# Altium PCB madiz_plate_v3_02.pcbdoc (part 1 of 2)
Units mil, origin at the board's own origin, x right, y up, seen from the top; angles counter-clockwise.
Board outline 3839.67 x 4045.62 mil, 2 copper layers (Top Layer, Bottom Layer); 68 components, 228 nets, 314 pads, 311 vias.
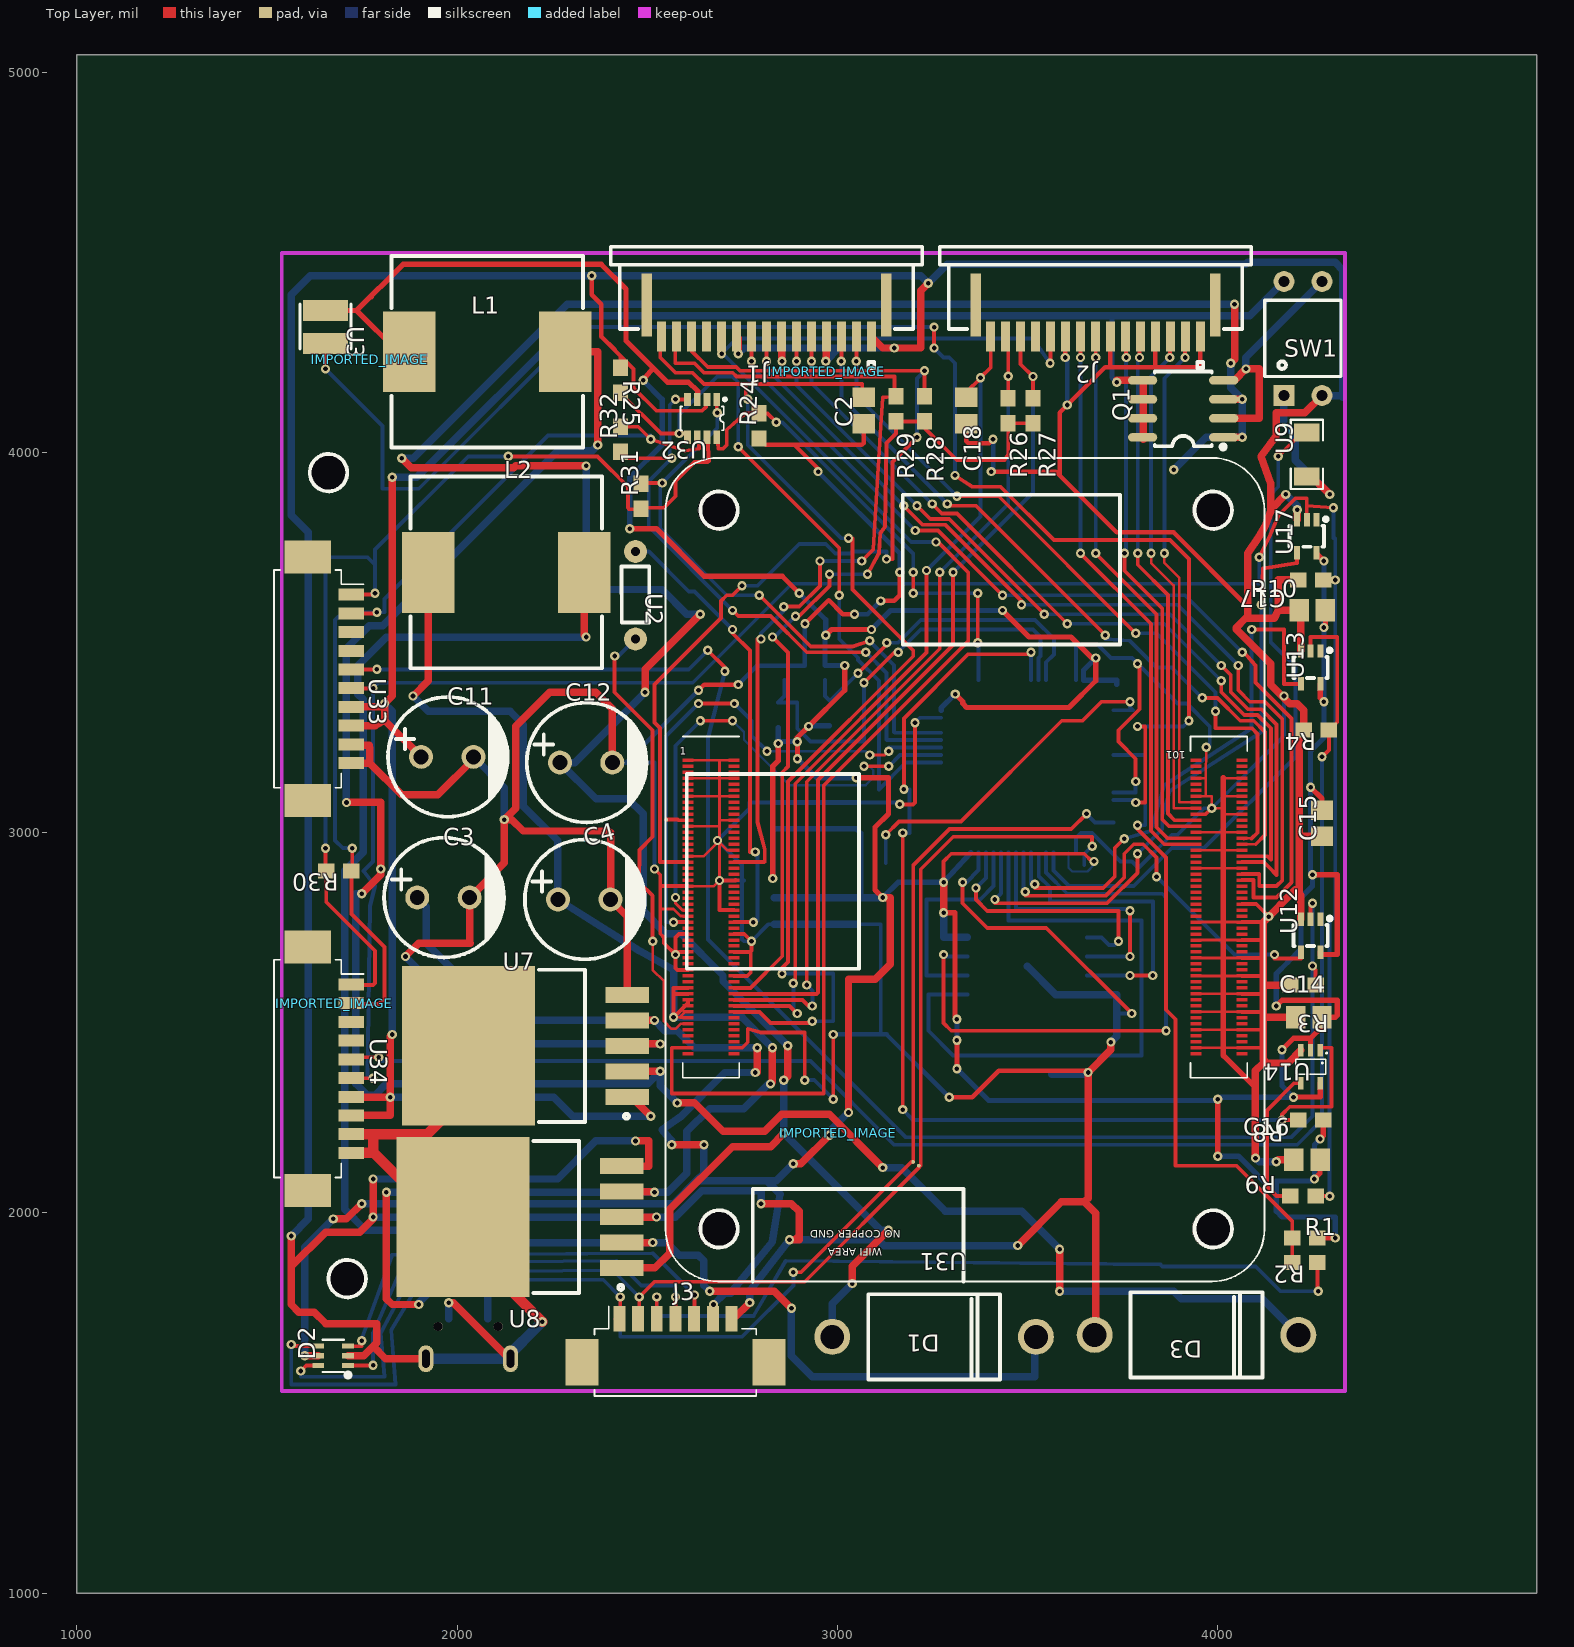
[diagram p0: Top Layer view]
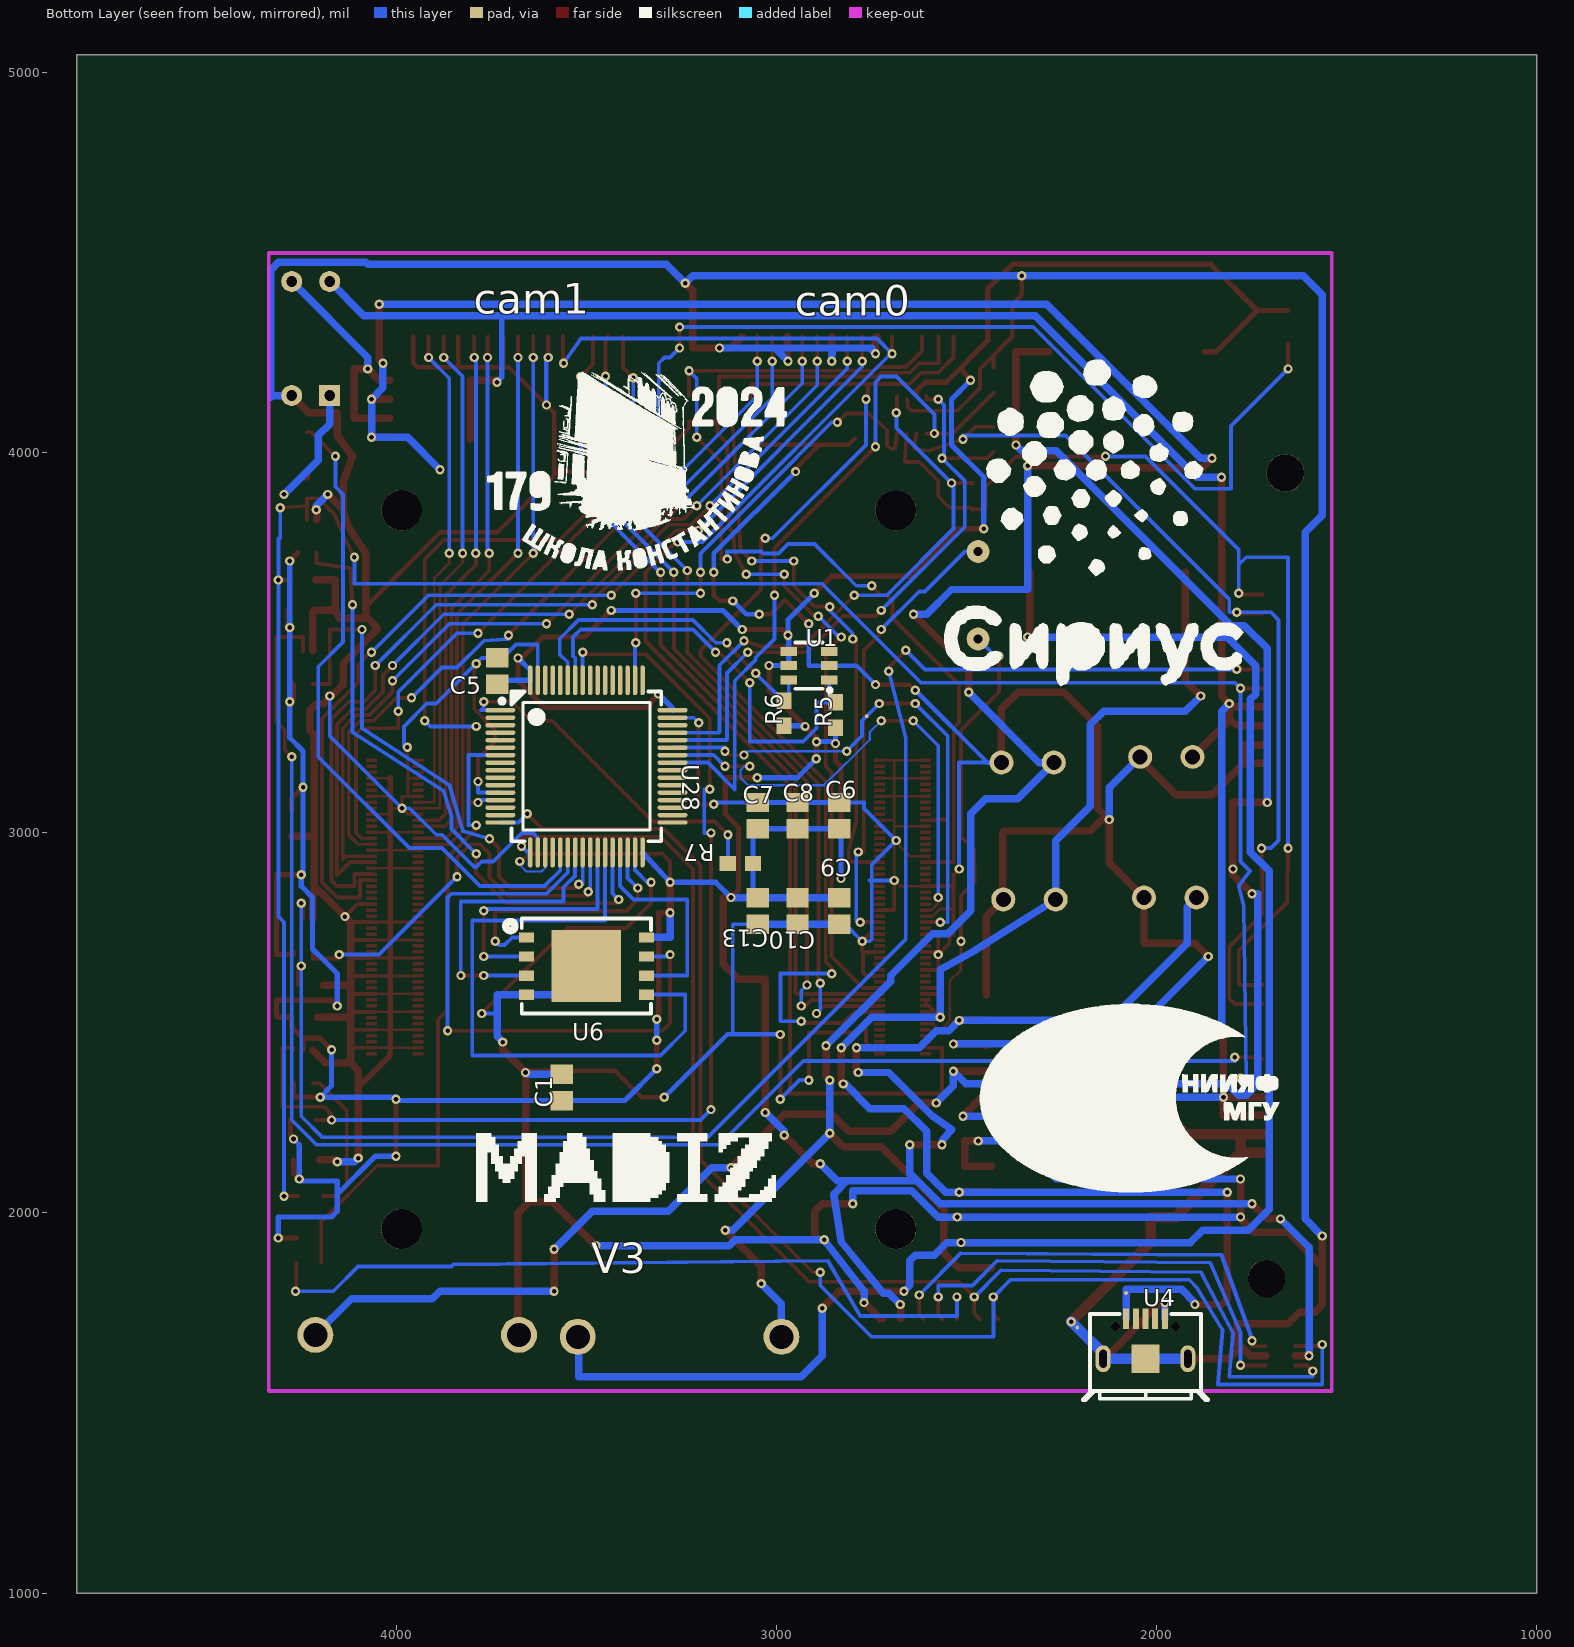
[diagram p1: Bottom Layer view, seen from below]

## Layer stack, top to bottom
Top Layer: signal copper (thickness not stored)
Dielectric: dielectric 12.6, FR-4, Dk 4.8
Bottom Layer: signal copper (thickness not stored)

## Board outline
4839.67,1000 1000,1000 1000,5045.62 4839.67,5045.62

## Components (designator, comment, footprint, x,y, rotation, side; value= is the part's Value field where it differs from the comment)
C1 "Capacitor 22pf" CAPACIOTR0805#1 3564.4,2329.4 r225 bottom
C2 "Capacitor 22pf" CAPACIOTR0805#2 3069.4,4109.4 r135 top
C3 "220uF" CAP-TH_BD8.0-P3.50-D0.6-FD 1964.4,2829.4 r0 top
C4 "220uF" CAP-TH_BD8.0-P3.50-D0.6-FD 2334.4,2824.4 r0 top
C5 "Capacitor 22pf" CAPACIOTR0805#1 3734.4,3424.4 r225 bottom
C6 "Capacitor 22pf" CAPACIOTR0805#1 2834.4,3044.4 r225 bottom
C7 "Capacitor 22pf" CAPACIOTR0805#1 3049.4,3044.4 r225 bottom
C8 "Capacitor 22pf" CAPACIOTR0805#1 2944.4,3044.4 r225 bottom
C9 "Capacitor 22pf" CAPACIOTR0805#1 2834.4,2794.4 r45 bottom
C10 "Capacitor 22pf" CAPACIOTR0805#1 2944.4,2794.4 r45 bottom
C11 "680uF" CAP-TH_BD8.0-P3.50-D0.6-FD 1974.4,3199.4 r0 top
C12 "680uF" CAP-TH_BD8.0-P3.50-D0.6-FD 2339.4,3184.4 r0 top
C13 "Capacitor 22pf" CAPACIOTR0805#1 3049.4,2794.4 r45 bottom
C14 "Capacitor 22pf" CAPACIOTR0805#2 4239.4,2514.4 r45 top
C15 "Capacitor 22pf" CAPACIOTR0805#2 4274.4,3024.4 r135 top
C16 "Capacitor 22pf" CAPACIOTR0805#2 4234.4,2139.4 r45 top
C17 "Capacitor 22pf" CAPACIOTR0805#2 4249.4,3584.4 r225 top
C18 "Capacitor 22pf" CAPACIOTR0805#2 3339.4,4109.4 r135 top
D1 "1N5822_C82806" DO-201AD_BD5.3-L8.4-P12.50-D1.4-RD 3254.4,1674.4 r180 top
D2 "PJSRV05W-4GDW" SOT-363_L2.0-W1.3-P0.65-LS2.1-BL 1674.4,1624.4 r90 top
D3 "1N5822_C82806" DO-201AD_BD5.3-L8.4-P12.50-D1.4-RD 3944.4,1679.4 r180 top
IMPORTED_IMAGE "IMPORTED_IMAGE" IMPORTED_IMAGE 1677.86,2549.59 r0 top
IMPORTED_IMAGE "IMPORTED_IMAGE" IMPORTED_IMAGE 1770.89,4243.84 r0 top
IMPORTED_IMAGE "IMPORTED_IMAGE" IMPORTED_IMAGE 3002,2209.1 r0 top
IMPORTED_IMAGE "IMPORTED_IMAGE" IMPORTED_IMAGE 2972.69,4211.9 r0 top
J1 "SFW15R-1STE1LF" SFW15R-1STE1LF 3089.4,4304.4 r180 top
J2 "SFW15R-1STE1LF" SFW15R-1STE1LF 3954.4,4304.4 r180 top
J3 "PICOBLADE_7_TH COPY" MOLEX_PICOBLADE_53261-0771_07X1.25MM_ANGLED 2574.4,1664.4 r0 top
L1 "330uH" IND-SMD_L12.8-W12.8_B953AS 2079.4,4264.4 r0 top
L2 "330uH" IND-SMD_L12.8-W12.8_B953AS 2129.4,3684.4 r0 top
Q1 "AO4832" SOIC-8_L5.0-W4.0-P1.27-LS6.0-BL 3909.4,4114.4 r90 top
R1 "4.7KOHM-1_10W-1%(0603)" 0603-RES#1 4229.4,1934.4 r0 top
R2 "4.7KOHM-1_10W-1%(0603)" 0603-RES#1 4229.4,1869.4 r180 top
R3 "4.7KOHM-1_10W-1%(0603)" 0603-RES#1 4224.4,2599.4 r180 top
R4 "4.7KOHM-1_10W-1%(0603)" 0603-RES#1 4259.4,3269.4 r180 top
R5 "4.7KOHM-1_10W-1%(0603)" 0603-RES#2 2844.4,3309.4 r270 bottom
R6 "4.7KOHM-1_10W-1%(0603)" 0603-RES#2 2979.4,3314.4 r270 bottom
R7 "4.7KOHM-1_10W-1%(0603)" 0603-RES#2 3094.4,2919.4 r180 bottom
R8 "4.7KOHM-1_10W-1%(0603)" 0603-RES#1 4244.4,2244.4 r180 top
R9 "4.7KOHM-1_10W-1%(0603)" 0603-RES#1 4224.4,2044.4 r180 top
R10 "4.7KOHM-1_10W-1%(0603)" 0603-RES#1 4244.4,3664.4 r0 top
R24 "4.7KOHM-1_10W-1%(0603)" 0603-RES#1 2794.4,4069.4 r90 top
R25 "4.7KOHM-1_10W-1%(0603)" 0603-RES#1 2429.4,4189.4 r270 top
R26 "4.7KOHM-1_10W-1%(0603)" 0603-RES#1 3449.4,4109.4 r90 top
R27 "4.7KOHM-1_10W-1%(0603)" 0603-RES#1 3514.4,4109.4 r90 top
R28 "4.7KOHM-1_10W-1%(0603)" 0603-RES#1 3229.4,4114.4 r90 top
R29 "4.7KOHM-1_10W-1%(0603)" 0603-RES#1 3154.4,4114.4 r90 top
R30 "4.7KOHM-1_10W-1%(0603)" 0603-RES#1 1689.4,2899.4 r180 top
R31 "4.7KOHM-1_10W-1%(0603)" 0603-RES#1 2484.4,3884.4 r90 top
R32 "4.7KOHM-1_10W-1%(0603)" 0603-RES#1 2429.4,4034.4 r90 top
SW1 "K1010" DIP4 4224.4,4299.4 r0 top
U1 "TMP100NA/3K" SOT-23-6_L2.9-W1.6-P0.95-LS2.8-BR 2914.4,3439.4 r0 bottom
U2 "RES_1/8W_2 COPY" RESISTOR-1/8W 2469.4,3659.4 r270 top
U3 "-" IND-SMD_L3.0-W2.8 1654.4,4329.4 r270 top
U4 "MC-605-AJT" MICRO-USB_SMD_HANBO_MC-605-ATJ 2029.4,1669.4 r0 bottom
U6 "MX35LF2G24AD-Z4I" WSON-8_L8.0-W6.0-P1.27-TL-EP-2 3499.4,2649.4 r0 bottom
U7 "LM2596HVGR-3.3" TO-263-5_L10.2-W9.2-P1.70-BR 2239.4,2439.4 r0 top
U8 "LM2596HVGR-5.0" TO-263-5_L10.2-W9.2-P1.70-BR 2224.4,1989.4 r0 top
U9 "100/1206" R1206 4234.4,3994.4 r90 top
U12 "SN74LVC1G17DCKR" SC-70-5_L2.1-W1.3-P0.65-LS2.1-BR 4244.4,2729.4 r90 top
U13 "SN74LVC1G17DCKR" SC-70-5_L2.1-W1.3-P0.65-LS2.1-BR 4244.4,3434.4 r90 top
U14 "SN74LVC1G125DCKT" SC-70-5_L2.0-W1.3-P0.65-LS2.1-BL 4244.4,2384.4 r180 top
U17 "SN74LVC1G17DCKR" SC-70-5_L2.1-W1.3-P0.65-LS2.1-BR 4234.4,3779.4 r90 top
U28 "STM32L496RGT3" LQFP-64_L10.0-W10.0-P0.50-LS12.0-BL 3499.4,3174.4 r90 bottom
U31 "RASPBERRY_CM4" RASPBERRY-PI-4-COMPUTE-MODULE 3335.65,2804.4 r180 top
U32 "TCAN330DCNR" SOT-23-8_L2.9-W1.6-P0.65-LS2.8-BL 2644.4,4089.4 r180 top
U33 "PicoBlade 10x1.25" MOLEX_PICOBLADE_53261-1071_10X1.25MM_ANGLED 1664.4,3404.4 r270 top
U34 "PicoBlade 10x1.25" MOLEX_PICOBLADE_53261-1071_10X1.25MM_ANGLED 1664.4,2379.4 r270 top

## Footprints (in the part's own frame and the unit in brackets; to place one, negate y for a bottom-side part, rotate by r counter-clockwise, add the part's x,y. Pads: shape width x height; smd on the part's side, far side on the other; paste and mask are expansions set on the pad)
0603-RES#1 [mil]
  rect 43.3x39.4 smd paste+0 mask+2: 1(-33,0) 2(33,0)
0603-RES#2 [mil]
  rect 43.3x39.4 smd paste+0 mask+2: 1(33,0) 2(-33,0)
CAP-TH_BD8.0-P3.50-D0.6-FD [mm]
  round 1.6 hole 1 paste+0 mask+0.051: 1(-1.75,0) 2(1.75,0)
  silkscreen extent -3.96,-4 4.04,4
CAPACIOTR0805#1 [mil]
  rect 59.06x51.18 smd rot 45 paste+0 mask+2: 1(24,-24) 2(-24.72,24.72)
CAPACIOTR0805#2 [mil]
  rect 59.06x51.18 smd rot 45 paste+0 mask+2: 1(-24,24) 2(24.72,-24.72)
DIP4 [mil]
  rect 55x55 hole 28 paste+0 mask+2: 1(-50,-150)
  round 55 hole 28 paste+0 mask+2: 2(50,-150) 3(50,150) 4(-50,150)
  silkscreen extent -100,-100 100,100
DO-201AD_BD5.3-L8.4-P12.50-D1.4-RD [mm]
  round 2.4 hole 1.6 paste+0 mask+0.051: 1(-6.8,0) 2(6.8,0)
  silkscreen extent -4.4,-2.85 4.4,2.85
IMPORTED_IMAGE [mil]
IND-SMD_L3.0-W2.8 [mm]
  rect 1.4x3 smd paste+0 mask+0.051: 1(-1.1,0) 2(1.1,0)
  silkscreen extent -1.55,-1.7 1.45,1.7
IND-SMD_L12.8-W12.8_B953AS [mm]
  rect 3.5x5.4 smd paste+0 mask+0.051: 1(-5.2,0) 2(5.2,0)
  silkscreen extent -6.4,-6.4 6.4,6.4
LQFP-64_L10.0-W10.0-P0.50-LS12.0-BL [mm]
  oval 0.3x2 smd paste+0 mask+0.051: 1(3.75,5.75) 2(3.25,5.75) 3(2.75,5.75) 4(2.25,5.75) 5(1.75,5.75) 6(1.25,5.75) 7(0.75,5.75) 8(0.25,5.75) 9(-0.25,5.75) 10(-0.75,5.75) 11(-1.25,5.75) 12(-1.75,5.75) 13(-2.25,5.75) 14(-2.75,5.75) 15(-3.25,5.75) 16(-3.75,5.75) 33(-3.75,-5.75) 34(-3.25,-5.75) 35(-2.75,-5.75) 36(-2.25,-5.75) 37(-1.75,-5.75) 38(-1.25,-5.75) 39(-0.75,-5.75) 40(-0.25,-5.75) 41(0.25,-5.75) 42(0.75,-5.75) 43(1.25,-5.75) 44(1.75,-5.75) 45(2.25,-5.75) 46(2.75,-5.75) 47(3.25,-5.75) 48(3.75,-5.75)
  oval 2x0.3 smd paste+0 mask+0.051: 17(-5.75,3.75) 18(-5.75,3.25) 19(-5.75,2.75) 20(-5.75,2.25) 21(-5.75,1.75) 22(-5.75,1.25) 23(-5.75,0.75) 24(-5.75,0.25) 25(-5.75,-0.25) 26(-5.75,-0.75) 27(-5.75,-1.25) 28(-5.75,-1.75) 29(-5.75,-2.25) 30(-5.75,-2.75) 31(-5.75,-3.25) 32(-5.75,-3.75) 49(5.75,-3.75) 50(5.75,-3.25) 51(5.75,-2.75) 52(5.75,-2.25) 53(5.75,-1.75) 54(5.75,-1.25) 55(5.75,-0.75) 56(5.75,-0.25) 57(5.75,0.25) 58(5.75,0.75) 59(5.75,1.25) 60(5.75,1.75) 61(5.75,2.25) 62(5.75,2.75) 63(5.75,3.25) 64(5.75,3.75)
  silkscreen extent -5,-5 5,5.79
MICRO-USB_SMD_HANBO_MC-605-ATJ [mm]
  rect 0.4x1.35 smd paste-100 mask+0.05: 1(1.3,-1.338) 2(0.65,-1.338) 3(0,-1.338) 4(-0.65,-1.338) 5(-1.3,-1.338)
  oval 1x1.8 hole 0.5 slot 1.2 at 90 deg paste+0 mask+0.05: 6(-2.824,1.337) 7(2.826,1.338)
  rect 1.9x1.9 smd paste-100 mask+0.05: 7(0,1.337)
  round 0.6 hole 0.6 unplated paste+0: ""(-2,-0.813) ""(2,-0.813)
  silkscreen extent -4.19,-1.65 4.19,4.09
MOLEX_PICOBLADE_53261-0771_07X1.25MM_ANGLED [mm]
  rect 0.8x1.7 smd paste+0 mask+0.102: 1(-3.75,1.45) 2(-2.5,1.45) 3(-1.25,1.45) 4(0,1.45) 5(1.25,1.45) 6(2.5,1.45) 7(3.75,1.45)
  rect 2.2x3.1 smd paste+0 mask+0.102: ""(-6.25,-1.45) ""(6.25,-1.45)
  silkscreen extent -5.4,-3.7 5.4,2.3
MOLEX_PICOBLADE_53261-1071_10X1.25MM_ANGLED [mm]
  rect 0.8x1.7 smd paste+0 mask+0.102: 1(-5.625,1.45) 2(-4.375,1.45) 3(-3.125,1.45) 4(-1.875,1.45) 5(-0.625,1.45) 6(0.625,1.45) 7(1.875,1.45) 8(3.125,1.45) 9(4.375,1.45) 10(5.625,1.45)
  rect 2.2x3.1 smd paste+0 mask+0.102: ""(-8.125,-1.45) ""(8.125,-1.45)
  silkscreen extent -7.28,-3.7 7.28,2.3
R1206 [mil]
  rect 47.54x66.97 smd paste-3937.01 mask+2: 1(-58.22,0) 2(58.22,0)
  silkscreen extent -91,-42 91,42
RASPBERRY-PI-4-COMPUTE-MODULE [mil]
  round 106.3 hole 106.3 unplated paste+0: ""(-649.61,846.45) ""(-649.61,-1043.3) ""(649.61,846.45) ""(649.61,-1043.3)
  Top Layer region: 714.57,-389.76 714.57,-381.89 742.12,-381.89 742.12,-389.76
  Top Layer region: 593.31,-389.76 593.31,-381.89 620.86,-381.89 620.86,-389.76
  Top Layer region: 714.57,-374.02 714.57,-366.14 742.12,-366.14 742.12,-374.02
  Top Layer region: 593.31,-374.02 593.31,-366.14 620.86,-366.14 620.86,-374.02
  Top Layer region: 714.57,-358.27 714.57,-350.39 742.12,-350.39 742.12,-358.27
  Top Layer region: 593.31,-358.27 593.31,-350.39 620.86,-350.39 620.86,-358.27
  Top Layer region: 714.57,-342.52 714.57,-334.64 742.12,-334.64 742.12,-342.52
  Top Layer region: 593.31,-342.52 593.31,-334.64 620.86,-334.64 620.86,-342.52
  Top Layer region: 714.57,-326.77 714.57,-318.9 742.12,-318.9 742.12,-326.77
  Top Layer region: 593.31,-326.77 593.31,-318.9 620.86,-318.9 620.86,-326.77
  Top Layer region: 714.57,-311.02 714.57,-303.15 742.12,-303.15 742.12,-311.02
  Top Layer region: 593.31,-311.02 593.31,-303.15 620.86,-303.15 620.86,-311.02
  Top Layer region: 714.57,-295.28 714.57,-287.4 742.12,-287.4 742.12,-295.28
  Top Layer region: 593.31,-295.28 593.31,-287.4 620.86,-287.4 620.86,-295.28
  Top Layer region: 714.57,-279.53 714.57,-271.65 742.12,-271.65 742.12,-279.53
  Top Layer region: 593.31,-279.53 593.31,-271.65 620.86,-271.65 620.86,-279.53
  Top Layer region: 714.57,-263.78 714.57,-255.9 742.12,-255.9 742.12,-263.78
  Top Layer region: 593.31,-263.78 593.31,-255.9 620.86,-255.9 620.86,-263.78
  Top Layer region: 714.57,-248.03 714.57,-240.16 742.12,-240.16 742.12,-248.03
  Top Layer region: 593.31,-248.03 593.31,-240.16 620.86,-240.16 620.86,-248.03
  Top Layer region: 714.57,-232.28 714.57,-224.41 742.12,-224.41 742.12,-232.28
  Top Layer region: 593.31,-232.28 593.31,-224.41 620.86,-224.41 620.86,-232.28
  Top Layer region: 714.57,-216.54 714.57,-208.66 742.12,-208.66 742.12,-216.54
  Top Layer region: 593.31,-216.54 593.31,-208.66 620.86,-208.66 620.86,-216.54
  Top Layer region: 714.57,-200.79 714.57,-192.91 742.12,-192.91 742.12,-200.79
  Top Layer region: 593.31,-200.79 593.31,-192.91 620.86,-192.91 620.86,-200.79
  Top Layer region: 714.57,-185.04 714.57,-177.16 742.12,-177.16 742.12,-185.04
  Top Layer region: 593.31,-185.04 593.31,-177.16 620.86,-177.16 620.86,-185.04
  Top Layer region: 714.57,-169.29 714.57,-161.42 742.12,-161.42 742.12,-169.29
  Top Layer region: 593.31,-169.29 593.31,-161.42 620.86,-161.42 620.86,-169.29
  Top Layer region: 714.57,-153.54 714.57,-145.67 742.12,-145.67 742.12,-153.54
  Top Layer region: 593.31,-153.54 593.31,-145.67 620.86,-145.67 620.86,-153.54
  Top Layer region: 714.57,-137.79 714.57,-129.92 742.12,-129.92 742.12,-137.79
  Top Layer region: 593.31,-137.79 593.31,-129.92 620.86,-129.92 620.86,-137.79
  Top Layer region: 714.57,-122.05 714.57,-114.17 742.12,-114.17 742.12,-122.05
  Top Layer region: 593.31,-122.05 593.31,-114.17 620.86,-114.17 620.86,-122.05
  Top Layer region: 714.57,-106.3 714.57,-98.42 742.12,-98.42 742.12,-106.3
  Top Layer region: 593.31,-106.3 593.31,-98.42 620.86,-98.42 620.86,-106.3
  Top Layer region: 714.57,-90.55 714.57,-82.68 742.12,-82.68 742.12,-90.55
  Top Layer region: 593.31,-90.55 593.31,-82.68 620.86,-82.68 620.86,-90.55
  Top Layer region: 714.57,-74.8 714.57,-66.93 742.12,-66.93 742.12,-74.8
  Top Layer region: 593.31,-74.8 593.31,-66.93 620.86,-66.93 620.86,-74.8
  Top Layer region: 714.57,-59.06 714.57,-51.18 742.12,-51.18 742.12,-59.06
  Top Layer region: 593.31,-59.06 593.31,-51.18 620.86,-51.18 620.86,-59.06
  Top Layer region: 714.57,-43.31 714.57,-35.43 742.12,-35.43 742.12,-43.31
  Top Layer region: 593.31,-43.31 593.31,-35.43 620.86,-35.43 620.86,-43.31
  Top Layer region: 714.57,-27.56 714.57,-19.68 742.12,-19.68 742.12,-27.56
  Top Layer region: 593.31,-27.56 593.31,-19.68 620.86,-19.68 620.86,-27.56
  Top Layer region: 714.57,-11.81 714.57,-3.94 742.12,-3.94 742.12,-11.81
  Top Layer region: 593.31,-11.81 593.31,-3.94 620.86,-3.94 620.86,-11.81
  Top Layer region: 714.57,3.94 714.57,11.81 742.12,11.81 742.12,3.94
  Top Layer region: 593.31,3.94 593.31,11.81 620.86,11.81 620.86,3.94
  Top Layer region: 714.57,19.68 714.57,27.56 742.12,27.56 742.12,19.68
  Top Layer region: 593.31,19.68 593.31,27.56 620.86,27.56 620.86,19.68
  Top Layer region: 714.57,35.43 714.57,43.31 742.12,43.31 742.12,35.43
  Top Layer region: 593.31,35.43 593.31,43.31 620.86,43.31 620.86,35.43
  Top Layer region: 714.57,51.18 714.57,59.06 742.12,59.06 742.12,51.18
  Top Layer region: 593.31,51.18 593.31,59.06 620.86,59.06 620.86,51.18
  Top Layer region: 714.57,66.93 714.57,74.8 742.12,74.8 742.12,66.93
  Top Layer region: 593.31,66.93 593.31,74.8 620.86,74.8 620.86,66.93
  Top Layer region: 714.57,82.68 714.57,90.55 742.12,90.55 742.12,82.68
  Top Layer region: 593.31,82.68 593.31,90.55 620.86,90.55 620.86,82.68
  Top Layer region: 714.57,98.42 714.57,106.3 742.12,106.3 742.12,98.42
  Top Layer region: 593.31,98.42 593.31,106.3 620.86,106.3 620.86,98.42
  Top Layer region: 714.57,114.17 714.57,122.05 742.12,122.05 742.12,114.17
  Top Layer region: 593.31,114.17 593.31,122.05 620.86,122.05 620.86,114.17
  Top Layer region: 714.57,129.92 714.57,137.8 742.12,137.8 742.12,129.92
  Top Layer region: 593.31,129.92 593.31,137.8 620.86,137.8 620.86,129.92
  Top Layer region: 714.57,145.67 714.57,153.54 742.12,153.54 742.12,145.67
  Top Layer region: 593.31,145.67 593.31,153.54 620.86,153.54 620.86,145.67
  Top Layer region: 714.57,161.42 714.57,169.29 742.12,169.29 742.12,161.42
  Top Layer region: 593.31,161.42 593.31,169.29 620.86,169.29 620.86,161.42
  Top Layer region: 714.57,177.16 714.57,185.04 742.12,185.04 742.12,177.16
  Top Layer region: 593.31,177.16 593.31,185.04 620.86,185.04 620.86,177.16
  Top Layer region: 714.57,192.91 714.57,200.79 742.12,200.79 742.12,192.91
  Top Layer region: 593.31,192.91 593.31,200.79 620.86,200.79 620.86,192.91
  Top Layer region: 714.57,208.66 714.57,216.54 742.12,216.54 742.12,208.66
  Top Layer region: 593.31,208.66 593.31,216.54 620.86,216.54 620.86,208.66
  Top Layer region: 714.57,224.41 714.57,232.28 742.12,232.28 742.12,224.41
  Top Layer region: 593.31,224.41 593.31,232.28 620.86,232.28 620.86,224.41
  Top Layer region: 714.57,240.16 714.57,248.03 742.12,248.03 742.12,240.16
  Top Layer region: 593.31,240.16 593.31,248.03 620.86,248.03 620.86,240.16
  Top Layer region: 714.57,255.9 714.57,263.78 742.12,263.78 742.12,255.9
  Top Layer region: 593.31,255.9 593.31,263.78 620.86,263.78 620.86,255.9
  Top Layer region: 714.57,271.65 714.57,279.53 742.12,279.53 742.12,271.65
  Top Layer region: 593.31,271.65 593.31,279.53 620.86,279.53 620.86,271.65
  Top Layer region: 714.57,287.4 714.57,295.28 742.12,295.28 742.12,287.4
  Top Layer region: 593.31,287.4 593.31,295.28 620.86,295.28 620.86,287.4
  Top Layer region: 714.57,303.15 714.57,311.02 742.12,311.02 742.12,303.15
  Top Layer region: 593.31,303.15 593.31,311.02 620.86,311.02 620.86,303.15
  Top Layer region: 714.57,318.9 714.57,326.77 742.12,326.77 742.12,318.9
  Top Layer region: 593.31,318.9 593.31,326.77 620.86,326.77 620.86,318.9
  Top Layer region: 714.57,334.64 714.57,342.52 742.12,342.52 742.12,334.64
  Top Layer region: 593.31,334.64 593.31,342.52 620.86,342.52 620.86,334.64
  Top Layer region: 714.57,350.39 714.57,358.27 742.12,358.27 742.12,350.39
  Top Layer region: 593.31,350.39 593.31,358.27 620.86,358.27 620.86,350.39
  Top Layer region: 714.57,366.14 714.57,374.02 742.12,374.02 742.12,366.14
  Top Layer region: 593.31,366.14 593.31,374.02 620.86,374.02 620.86,366.14
  Top Layer region: 714.57,381.89 714.57,389.76 742.12,389.76 742.12,381.89
  Top Layer region: 593.31,381.89 593.31,389.76 620.86,389.76 620.86,381.89
  Top Layer region: -620.86,-389.76 -620.86,-381.89 -593.31,-381.89 -593.31,-389.76
  Top Layer region: -742.12,-389.76 -742.12,-381.89 -714.57,-381.89 -714.57,-389.76
  Top Layer region: -620.86,-374.02 -620.86,-366.14 -593.31,-366.14 -593.31,-374.02
  Top Layer region: -742.12,-374.02 -742.12,-366.14 -714.57,-366.14 -714.57,-374.02
  Top Layer region: -620.86,-358.27 -620.86,-350.39 -593.31,-350.39 -593.31,-358.27
  Top Layer region: -742.12,-358.27 -742.12,-350.39 -714.57,-350.39 -714.57,-358.27
  Top Layer region: -620.86,-342.52 -620.86,-334.64 -593.31,-334.64 -593.31,-342.52
  Top Layer region: -742.12,-342.52 -742.12,-334.64 -714.57,-334.64 -714.57,-342.52
  Top Layer region: -620.86,-326.77 -620.86,-318.9 -593.31,-318.9 -593.31,-326.77
  Top Layer region: -742.12,-326.77 -742.12,-318.9 -714.57,-318.9 -714.57,-326.77
  Top Layer region: -620.86,-311.02 -620.86,-303.15 -593.31,-303.15 -593.31,-311.02
  Top Layer region: -742.12,-311.02 -742.12,-303.15 -714.57,-303.15 -714.57,-311.02
  Top Layer region: -620.86,-295.28 -620.86,-287.4 -593.31,-287.4 -593.31,-295.28
  Top Layer region: -742.12,-295.28 -742.12,-287.4 -714.57,-287.4 -714.57,-295.28
  Top Layer region: -620.86,-279.53 -620.86,-271.65 -593.31,-271.65 -593.31,-279.53
  Top Layer region: -742.12,-279.53 -742.12,-271.65 -714.57,-271.65 -714.57,-279.53
  Top Layer region: -620.86,-263.78 -620.86,-255.9 -593.31,-255.9 -593.31,-263.78
  Top Layer region: -742.12,-263.78 -742.12,-255.9 -714.57,-255.9 -714.57,-263.78
  Top Layer region: -620.86,-248.03 -620.86,-240.16 -593.31,-240.16 -593.31,-248.03
  Top Layer region: -742.12,-248.03 -742.12,-240.16 -714.57,-240.16 -714.57,-248.03
  Top Layer region: -620.86,-232.28 -620.86,-224.41 -593.31,-224.41 -593.31,-232.28
  Top Layer region: -742.12,-232.28 -742.12,-224.41 -714.57,-224.41 -714.57,-232.28
  Top Layer region: -620.86,-216.53 -620.86,-208.66 -593.31,-208.66 -593.31,-216.53
  Top Layer region: -742.12,-216.53 -742.12,-208.66 -714.57,-208.66 -714.57,-216.53
  Top Layer region: -620.86,-200.79 -620.86,-192.91 -593.31,-192.91 -593.31,-200.79
  Top Layer region: -742.12,-200.79 -742.12,-192.91 -714.57,-192.91 -714.57,-200.79
  Top Layer region: -620.86,-185.04 -620.86,-177.16 -593.31,-177.16 -593.31,-185.04
  Top Layer region: -742.12,-185.04 -742.12,-177.16 -714.57,-177.16 -714.57,-185.04
  Top Layer region: -620.86,-169.29 -620.86,-161.42 -593.31,-161.42 -593.31,-169.29
  Top Layer region: -742.12,-169.29 -742.12,-161.42 -714.57,-161.42 -714.57,-169.29
  Top Layer region: -620.86,-153.54 -620.86,-145.67 -593.31,-145.67 -593.31,-153.54
  Top Layer region: -742.12,-153.54 -742.12,-145.67 -714.57,-145.67 -714.57,-153.54
  Top Layer region: -620.86,-137.79 -620.86,-129.92 -593.31,-129.92 -593.31,-137.79
  Top Layer region: -742.12,-137.79 -742.12,-129.92 -714.57,-129.92 -714.57,-137.79
  Top Layer region: -620.86,-122.05 -620.86,-114.17 -593.31,-114.17 -593.31,-122.05
  Top Layer region: -742.12,-122.05 -742.12,-114.17 -714.57,-114.17 -714.57,-122.05
  Top Layer region: -620.86,-106.3 -620.86,-98.42 -593.31,-98.42 -593.31,-106.3
  Top Layer region: -742.12,-106.3 -742.12,-98.42 -714.57,-98.42 -714.57,-106.3
  Top Layer region: -620.86,-90.55 -620.86,-82.68 -593.31,-82.68 -593.31,-90.55
  Top Layer region: -742.12,-90.55 -742.12,-82.68 -714.57,-82.68 -714.57,-90.55
  Top Layer region: -620.86,-74.8 -620.86,-66.93 -593.31,-66.93 -593.31,-74.8
  Top Layer region: -742.12,-74.8 -742.12,-66.93 -714.57,-66.93 -714.57,-74.8
  Top Layer region: -620.86,-59.05 -620.86,-51.18 -593.31,-51.18 -593.31,-59.05
  Top Layer region: -742.12,-59.05 -742.12,-51.18 -714.57,-51.18 -714.57,-59.05
  Top Layer region: -620.86,-43.31 -620.86,-35.43 -593.31,-35.43 -593.31,-43.31
  Top Layer region: -742.12,-43.31 -742.12,-35.43 -714.57,-35.43 -714.57,-43.31
  Top Layer region: -620.86,-27.56 -620.86,-19.68 -593.31,-19.68 -593.31,-27.56
  Top Layer region: -742.12,-27.56 -742.12,-19.68 -714.57,-19.68 -714.57,-27.56
  Top Layer region: -620.86,-11.81 -620.86,-3.94 -593.31,-3.94 -593.31,-11.81
  Top Layer region: -742.12,-11.81 -742.12,-3.94 -714.57,-3.94 -714.57,-11.81
  Top Layer region: -620.86,3.94 -620.86,11.81 -593.31,11.81 -593.31,3.94
  Top Layer region: -742.12,3.94 -742.12,11.81 -714.57,11.81 -714.57,3.94
  Top Layer region: -620.86,19.69 -620.86,27.56 -593.31,27.56 -593.31,19.69
  Top Layer region: -742.12,19.69 -742.12,27.56 -714.57,27.56 -714.57,19.69
  Top Layer region: -620.86,35.43 -620.86,43.31 -593.31,43.31 -593.31,35.43
  Top Layer region: -742.12,35.43 -742.12,43.31 -714.57,43.31 -714.57,35.43
  Top Layer region: -620.86,51.18 -620.86,59.06 -593.31,59.06 -593.31,51.18
  Top Layer region: -742.12,51.18 -742.12,59.06 -714.57,59.06 -714.57,51.18
  Top Layer region: -620.86,66.93 -620.86,74.8 -593.31,74.8 -593.31,66.93
  Top Layer region: -742.12,66.93 -742.12,74.8 -714.57,74.8 -714.57,66.93
  Top Layer region: -620.86,82.68 -620.86,90.55 -593.31,90.55 -593.31,82.68
  Top Layer region: -742.12,82.68 -742.12,90.55 -714.57,90.55 -714.57,82.68
  Top Layer region: -620.86,98.42 -620.86,106.3 -593.31,106.3 -593.31,98.42
  Top Layer region: -742.12,98.42 -742.12,106.3 -714.57,106.3 -714.57,98.42
  Top Layer region: -620.86,114.17 -620.86,122.05 -593.31,122.05 -593.31,114.17
  Top Layer region: -742.12,114.17 -742.12,122.05 -714.57,122.05 -714.57,114.17
  Top Layer region: -620.86,129.92 -620.86,137.8 -593.31,137.8 -593.31,129.92
  Top Layer region: -742.12,129.92 -742.12,137.8 -714.57,137.8 -714.57,129.92
  Top Layer region: -620.86,145.67 -620.86,153.54 -593.31,153.54 -593.31,145.67
  Top Layer region: -742.12,145.67 -742.12,153.54 -714.57,153.54 -714.57,145.67
  Top Layer region: -620.86,161.42 -620.86,169.29 -593.31,169.29 -593.31,161.42
  Top Layer region: -742.12,161.42 -742.12,169.29 -714.57,169.29 -714.57,161.42
  Top Layer region: -620.86,177.16 -620.86,185.04 -593.31,185.04 -593.31,177.16
  Top Layer region: -742.12,177.16 -742.12,185.04 -714.57,185.04 -714.57,177.16
  Top Layer region: -620.86,192.91 -620.86,200.79 -593.31,200.79 -593.31,192.91
  Top Layer region: -742.12,192.91 -742.12,200.79 -714.57,200.79 -714.57,192.91
  Top Layer region: -620.86,208.66 -620.86,216.54 -593.31,216.54 -593.31,208.66
  Top Layer region: -742.12,208.66 -742.12,216.54 -714.57,216.54 -714.57,208.66
  Top Layer region: -620.86,224.41 -620.86,232.28 -593.31,232.28 -593.31,224.41
  Top Layer region: -742.12,224.41 -742.12,232.28 -714.57,232.28 -714.57,224.41
  Top Layer region: -620.86,240.16 -620.86,248.03 -593.31,248.03 -593.31,240.16
  Top Layer region: -742.12,240.16 -742.12,248.03 -714.57,248.03 -714.57,240.16
  Top Layer region: -620.86,255.9 -620.86,263.78 -593.31,263.78 -593.31,255.9
  Top Layer region: -742.12,255.9 -742.12,263.78 -714.57,263.78 -714.57,255.9
  Top Layer region: -620.86,271.65 -620.86,279.53 -593.31,279.53 -593.31,271.65
  Top Layer region: -742.12,271.65 -742.12,279.53 -714.57,279.53 -714.57,271.65
  Top Layer region: -620.86,287.4 -620.86,295.28 -593.31,295.28 -593.31,287.4
  Top Layer region: -742.12,287.4 -742.12,295.28 -714.57,295.28 -714.57,287.4
  Top Layer region: -620.86,303.15 -620.86,311.02 -593.31,311.02 -593.31,303.15
  Top Layer region: -742.12,303.15 -742.12,311.02 -714.57,311.02 -714.57,303.15
  Top Layer region: -620.86,318.9 -620.86,326.77 -593.31,326.77 -593.31,318.9
  Top Layer region: -742.12,318.9 -742.12,326.77 -714.57,326.77 -714.57,318.9
  Top Layer region: -620.86,334.64 -620.86,342.52 -593.31,342.52 -593.31,334.64
  Top Layer region: -742.12,334.64 -742.12,342.52 -714.57,342.52 -714.57,334.64
  Top Layer region: -620.86,350.39 -620.86,358.27 -593.31,358.27 -593.31,350.39
  Top Layer region: -742.12,350.39 -742.12,358.27 -714.57,358.27 -714.57,350.39
  Top Layer region: -620.86,366.14 -620.86,374.02 -593.31,374.02 -593.31,366.14
  Top Layer region: -742.12,366.14 -742.12,374.02 -714.57,374.02 -714.57,366.14
  Top Layer region: -620.86,381.89 -620.86,389.76 -593.31,389.76 -593.31,381.89
  Top Layer region: -742.12,381.89 -742.12,389.76 -714.57,389.76 -714.57,381.89
  silkscreen extent -787,-1181 787,984
RESISTOR-1/8W [mil]
  round 60 hole 23.6 paste+0 mask+2: 1(-80,0)
  round 60 hole 23.6 paste+0 mask+4: 2(150,0)
  silkscreen extent -41,-37 107,36
SC-70-5_L2.0-W1.3-P0.65-LS2.1-BL [mm]
  rect 0.35x0.85 smd paste+0 mask+0.05: 1(-0.65,-1.1) 2(0,-1.1) 3(0.65,-1.1) 4(0.65,1.1) 5(-0.65,1.1)
  silkscreen extent -1.12,-0.96 1,0.5
SC-70-5_L2.1-W1.3-P0.65-LS2.1-BR [mm]
  rect 0.9x0.4 smd paste+0 mask+0.051: 1(1.1,-0.65) 2(1.1,0) 3(1.1,0.65) 4(-1.1,0.65) 5(-1.1,-0.65)
  silkscreen extent -0.7,-1.4 1.27,1.15
SFW15R-1STE1LF [mm]
  rect 0.6x2 smd paste+0: 1(0,0) 2(1,0) 3(2,0) 4(3,0) 5(4,0) 6(5,0) 7(6,0) 8(7,0) 9(8,0) 10(9,0) 11(10,0) 12(11,0) 13(12,0) 14(13,0) 15(14,0)
  rect 0.7x4.2 smd paste+0: G1(-1,-2.1) G2(15,-2.1)
  silkscreen extent -3.4,-6 17.4,2.1
SOIC-8_L5.0-W4.0-P1.27-LS6.0-BL [mil]
  oval 22.38x76.78 smd paste+0 mask+2: 1(-75,-106.5) 2(-25,-106.5) 3(25,-106.5) 4(75,-106.5) 5(75,106.5) 6(25,106.5) 7(-25,106.5) 8(-75,106.5)
  silkscreen extent -106,-111 98,75
SOT-23-6_L2.9-W1.6-P0.95-LS2.8-BR [mm]
  rect 1.1x0.6 smd paste+0 mask+0.051: 1(-1.35,0.95) 2(-1.35,0) 3(-1.35,-0.95) 4(1.35,-0.95) 5(1.35,0) 6(1.35,0.95)
  silkscreen extent -1.52,-1.55 0.9,1.78
SOT-23-8_L2.9-W1.6-P0.65-LS2.8-BL [mm]
  rect 0.45x0.9 smd paste+0 mask+0.051: 1(-0.975,-1.26) 2(-0.325,-1.26) 3(0.325,-1.26) 4(0.975,-1.26) 5(0.975,1.26) 6(0.325,1.26) 7(-0.325,1.26) 8(-0.975,1.26)
  silkscreen extent -1.62,-1.37 1.45,0.8
SOT-363_L2.0-W1.3-P0.65-LS2.1-BL [mm]
  rect 0.35x0.78 smd paste+0 mask+0.051: 1(-0.65,-0.99) 2(0,-0.99) 3(0.65,-0.99) 4(0.65,0.99) 5(0,0.99) 6(-0.65,0.99)
  silkscreen extent -1.43,-1.14 1.08,0.7
TO-263-5_L10.2-W9.2-P1.70-BR [mm]
  rect 2.9x1.069 smd paste+0 mask+0.051: 1(5.303,-3.404) 2(5.303,-1.702) 3(5.303,0) 4(5.303,1.702) 5(5.303,3.404)
  rect 8.89x10.66 smd paste+0 mask+0.051: 6(-5.302,0)
  silkscreen extent -0.6,-5.08 5.4,5.08
WSON-8_L8.0-W6.0-P1.27-TL-EP-2 [mm]
  rect 1x0.7 smd paste+0 mask+0.05: 1(4,-1.905) 2(4,-0.635) 3(4,0.635) 4(4,1.905) 5(-4,1.905) 6(-4,0.635) 7(-4,-0.635) 8(-4,-1.905)
  rect 4.65x4.8 smd paste+0 mask+0.05: 9(0,0)
  silkscreen extent -4.32,-3.17 5.38,3.17

## Free pads (board coordinates)
  round 10 smd paste+0 mask+2: 6(2550.03,3034.4)
  round 10 smd far side paste+4 mask+2: 7(2762.4,3306.4) 9(2080.58,1789.4) 10(2208.82,1698.82)
  round 10 smd paste+4 mask+2: 11(3214.4,2124.4) 12(3199.4,2134.4)
  round 98.43 hole 98.43 unplated paste+0: ""(1661.84,3945.66) ""(1711.05,1827.55)

## Via types
v1: diameter 24.41, hole 12.2, Top Layer to Bottom Layer, tented both sides, 311 vias

## Nets (pads, with @x,y where several pads share a name; then routed paths per layer and width w, separated by ;. In a path a pad name is that pad's centre, name@x,y a point inside that pad or via, vN(x,y) a via of type N, cw(c..) or ccw(c..) an arc to the next point about the centre after c; other vN are vias at no path point)
3V3: C1.1 C3.1 C5.1 C6.1 C7.1 C8.1 C9.1 C10.1 C13.1 C14.2 C15.2 C16.2 C17.1 D2.5 J3.6 L1.1 R1.2 R5.1 R6.1 R7.1 R8.1 U1.4 U1.5 U3.1 U6.8 U7.4 U12.5 U13.5 U14.2 U14.5 U17.5 U28.19 U28.32 U28.48 U28.64 U32.3 | length 17216.6
  Top Layer w10: v1(3279.4,2869.4) 3279.4,2924.4 3299.4,2944.4 3649.4,2944.4 3669.4,2924.4 v1(3675.03,2924.4)
  Top Layer w13.78: U3.1@1654.4,4372.72 1736.09,4372.71 ; 1774.4,4409.4 1772.78,4409.4 1736.09,4372.71 ; L1.1@1874.68,4264.4 1844.4,4264.4 1736.09,4372.71 ; v1(2454.4,3799.4) 2524.4,3799.4 2649.4,3674.4 2855.03,3674.4 v1(2900.03,3629.4) ; v1(2489.4,4189.4) 2514.4,4219.4 ; U32.3@2631.6,4149 2633.3,4161 2608.5,4184.4 2553.4,4184.4 2444.4,4293.4 2444.4,4429.4 2379.4,4494.4 1857.8,4494.4 1736.1,4372.7 ; v1(2830.03,2879.4) 2830,3174.4 2844.4,3188.8 v1(2844.4,3234.4) ; v1(2895.03,3194.4) 2895.03,3238.77 v1(2894.4,3239.4) 2894.4,3249.4 v1(2924.4,3279.4) 3019.4,3374.4 v1(3019.4,3439.4) ; v1(2969.4,3519.4) 2984.39,3534.4 v1(3090.03,3534.4) ; v1(3050.03,3144.4) 3134.4,3144.4 3134.4,3049.4 3099.4,3014.4 3099.4,2849.4 v1(3119.4,2829.4) ; v1(3279.4,2789.4) 3309.4,2789.4 3309.4,2514.4 v1(3314.4,2509.4) ; v1(3310.03,3364.4) 3330,3344.43 3330,3339.4 3340,3329.4 3609.4,3329.4 3679.4,3399.4 v1(3679.4,3459.4) 3669.4,3459.4 3614.4,3514.4 3504.4,3514.4 v1(3434.4,3584.4) ; v1(3314.4,2379.4) v1(3314.4,2454.4) ; v1(4000.03,2299.4) v1(4000.03,2149.4) v1@4004.4,2149.4 ; v1(4154.4,2544.4) 4169.4,2559.4 4314.4,2559.4 4314.4,2519.4 4309.4,2514.4 C14.2@4274.36,2514.4 4274.4,2489.4 4244.4,2459.4 ; v1(4169.4,2429.4) 4199.4,2459.4 4244.4,2459.4 ; v1(4199.4,2304.4) 4270,2305 U14.5@4269.99,2341.09 ; U14.2@4244.4,2427.7 4244.4,2459.4 ; v1(4244.4,3119.4) 4274.4,3089.4 C15.2@4274.4,3059.36 ; v1(4249.4,2889.4) 4314.4,2889.4 4314.4,2679.4 4269.99,2679.4 U12.5@4269.99,2686.09 ; v1(4254.4,2089.4) 4269.36,2104.36 C16.2@4269.36,2139.4 ; U17.5@4259.99,3736.09 4259.99,3733.81 v1(4279.4,3714.4) ; R1.2@4262.4,1934.4 v1(4309.4,1934.4) ; v1(4269.4,2194.4) 4277.4,2202.4 R8.1@4277.4,2244.4 ; U13.5@4269.99,3391.09 4269.99,3353.81 v1(4279.4,3344.4) ; v1(4279.4,3539.4) 4283.34,3543.34 C17.1@4283.34,3584.4
  Top Layer w19.68: v1(1599.4,1624.4) D2.5@1635.42,1624.4 ; v1(1674.4,1984.4) 1709.4,1984.4 v1(1749.4,2024.4) ; U7.4@2448.16,2506.4 v1(2519.4,2506.4) ; v1(2564.4,2179.4) v1(2649.4,2179.4) ; J3.6@2672.82,1721.48 2672.82,1757.82 v1(2674.4,1759.4) ; v1(2784.4,2369.4) 2789.4,2369.4 v1(2789.4,2434.4) ; v1(2884.4,2129.4) 2904.4,2129.4 v1(2979.4,2204.4) ; v1(3029.4,2264.4) 3029.4,2614.4 3099.4,2614.4 3139.4,2654.4 3139.4,2829.4 v1(3119.4,2829.4) ; v1(3279.4,2789.4) v1(3279.4,2869.4)
  Bottom Layer w6: U28.19@3607.67,2948.03 3607.7,2908 3617.7,2898 3657.7,2898 3675,2915.4 v1(3675.03,2924.4)
  Bottom Layer w13.78: v1(2454.4,3799.4) 2454.4,3934.4 2539.4,4019.4 2539.4,4139.4 v1(2489.4,4189.4) ; v1(2830.03,2879.4) 2830.03,3006.09 C6.1@2834.4,3010.46 C8.1@2944.4,3010.46 C7.1@3049.4,3010.46 3061.4,2998.46 R7.1@3061.4,2919.4 3061.4,2840.34 C13.1@3049.4,2828.34 ; R5.1@2844.4,3276.4 v1(2844.4,3234.4) 2849.4,3239.4 v1(2894.4,3239.4) ; v1(2895.03,3194.4) 2945.03,3144.4 v1(3050.03,3144.4) ; v1(2900.03,3629.4) 2969.4,3560.03 v1(2969.4,3519.4) 2967.55,3517.55 2967.55,3476.8 2967.55,3439.4 v1(3019.4,3439.4) ; v1(2924.4,3279.4) 2926.4,3281.4 R6.1@2979.4,3281.4 ; v1(3090.03,3534.4) 3140.03,3584.4 v1(3434.4,3584.4) ; v1(3119.4,2829.4) 3159.4,2869.4 v1(3279.4,2869.4) U28.32@3351.76,2948.03 ; U28.48@3273.03,3322.04 3273.04,3327.41 v1(3310.03,3364.4) ; v1(3314.4,2379.4) 3398.34,2295.46 C1.1@3564.4,2295.46 3996.09,2295.46 v1(4000.03,2299.4) 4005.03,2304.4 v1(4199.4,2304.4) 4169.4,2334.4 v1(4169.4,2429.4) ; v1(3314.4,2454.4) v1(3314.4,2509.4) ; U28.64@3647.04,3400.77 3734.4,3400.8 C5.1@3734.4,3390.46 ; U28.64@3647.04,3400.77 3647.04,3427.04 v1(3679.4,3459.4) ; v1(4000.03,2149.4) 4054.4,2149.4 4154.4,2049.4 4154.4,2039.7 ; v1(4154.4,2544.4) 4154.4,2629.4 4184.4,2659.4 4219.4,2694.4 4219.4,2829.4 4249.4,2859.4 v1(4249.4,2889.4) 4244.4,2894.4 v1(4244.4,3119.4) 4244.4,3214.4 4279.4,3249.4 v1(4279.4,3344.4) v1(4279.4,3539.4) v1(4279.4,3714.4) ; v1(4269.4,2194.4) 4254.4,2179.4 v1(4254.4,2089.4) 4249.4,2084.4 4154.4,2084.4 4154.4,2004.4 4169.4,1989.4 4309.4,1989.4 v1(4309.4,1934.4)
  Bottom Layer w19.68: v1(1599.4,1624.4) 1599.4,1889.4 1599.4,1909.4 v1(1674.4,1984.4) ; v1(1749.4,2024.4) 2569.4,2024.4 2629.4,2084.4 ; C3.1@1895.5,2829.4 1919.4,2805.49 1919.4,2709.4 2122.4,2506.4 v1(2519.4,2506.4) 2546.4,2479.4 2579.4,2479.4 2624.4,2434.4 v1(2789.4,2434.4) ; v1(2564.4,2179.4) 2564.4,2189.4 2539.4,2219.4 2589.4,2254.4 2704.4,2369.4 v1(2784.4,2369.4) ; v1(2649.4,2179.4) 2649.4,2104.4 2629.4,2084.4 ; v1(2674.4,1759.4) 2704.4,1789.4 2719.4,1789.4 2829.4,1924.4 2849.4,2049.4 2814.4,2084.4 ; C9.1@2834.4,2828.34 C10.1@2944.4,2828.34 C13.1@3049.4,2828.34 3118.34,2828.34 v1(3119.4,2829.4) ; v1(2884.4,2129.4) 2839.4,2084.4 2814.4,2084.4 ; v1(2979.4,2204.4) 2979.4,2214.4 v1(3029.4,2264.4) ; v1(3279.4,2789.4) 3279.4,2724.4 U6.8@3341.92,2724.4 ; 2629.4,2084.4 2814.4,2084.4
5V: C4.1 L2.1 pad.9 U4.1 U8.4 | length 4412.1
  Top Layer w6: 2569.4,2576.1 2569.4,2591.8 2607.31,2591.8
  Top Layer w7: 2607.31,2513.06 2587.31,2513.06 2585.97,2514.4 v1(2569.4,2514.4) 2585.35,2514.4 2599.76,2528.81 2607.31,2528.81
  Top Layer w10: 2569.4,2544.56 2569.4,2591.8 ; 2569.4,2560.31 2569.4,2591.8 ; 2607.31,2560.31 2607.31,2552.31 v1(2569.4,2514.4) 2569.4,2576.05 2607.31,2576.05 ; 2569.4,2591.8 2607.31,2591.8 2569.4,2591.8
  Top Layer w19.68: v1(1814.4,2054.4) 1814.4,1774.4 1829.4,1759.4 v1(1899.4,1759.4) ; v1(1884.4,3359.4) 1924.68,3399.68 L2.1@1924.68,3684.4 ; U8.4@2433.16,2056.4 2517.4,2056.4 v1(2519.4,2054.4) ; v1(2824.4,2339.4) 2829.4,2344.4 v1(2829.4,2434.4)
  Bottom Layer w19.68: v1(1814.4,2054.4) v1(2519.4,2054.4) 2554.4,2054.4 2604.4,2104.4 2604.4,2214.4 2664.4,2274.41 2754.41,2274.41 2819.4,2339.4 v1(2824.4,2339.4) ; v1(1884.4,3359.4) 1924.4,3319.4 2139.4,3319.4 2174.4,3284.4 2174.4,3069.4 2265.5,2978.3 C4.1@2265.5,2824.4 2479.4,2689.4 2569.4,2639.4 v1(2569.4,2514.4) 2749.4,2514.4 v1(2829.4,2434.4) ; v1(1899.4,1759.4) 1899.4,1764.4 1934.4,1799.4 2080.6,1799.4 pad.9@2080.58,1789.4 U4.1@2080.58,1722.06
C2_2: C2.2 J1.15 | length 3076.2
  Top Layer w10: J1.15@2534.4,4304.4 2534.4,4249.7 2574.7,4209.4 2619.4,4209.4 2649.4,4179.4 3065.6,4179.4 C2.2@3065.6,4144.4 ; 2728.56,2528.81 2794.99,2528.81 2824.4,2499.4 2934.4,2499.4 v1(2934.4,2504.4) ; 2759.4,4179.4 2759.4,4144.4 v1(2764.4,4139.4) ; v1@2854.7,2634.4 2854.7,2644.4 2870,2659.7 2870,3134.4 3199.7,3464.1 3199.7,3479.4 3040,3639.1 3040,3774.4 v1(3029.4,3774.4)
  Bottom Layer w10: v1(2764.4,4139.4) 2764.4,4019.4 3009.4,3774.4 v1(3029.4,3774.4) ; v1(2854.4,2629.4) 2989.4,2629.4 2989.4,2504.4 v1(2934.4,2504.4)
C18_2: C18.2 J2.15 | length 2244.3
  Top Layer w10: 2728.56,2544.56 2874.24,2544.56 v1(2894.4,2524.4) ; v1(2884.4,2604.4) 2889.4,2604.4 2889.4,3128.8 3234.4,3473.8 v1(3234.4,3689.4) ; C18.2@3339.4,4144.36 3339.4,4159.4 3376.48,4194.44 v1(3376.49,4196.48) 3403.22,4223.22 J2.15@3403.22,4304.4
  Bottom Layer w10: v1(2884.4,2604.4) 2884.4,2534.4 v1(2894.4,2524.4) ; v1(3234.4,3689.4) 3376.5,3831.5 v1(3376.49,4196.48)
D2_1: D2.1 J3.4 | length 1186.8
  Top Layer w10: D2.1@1713.38,1598.81 1778.81,1598.81 v1(1779.4,1599.4) ; J3.4@2564.4,1721.48 2574.4,1731.48 v1(2574.4,1779.4)
  Bottom Layer w10: v1(1779.4,1599.4) 1779.4,1684.4 1859.4,1869.4 2419.4,1874.4 2484.4,1809.4 2574.4,1809.4 v1(2574.4,1779.4)
D2_3: D2.3 J3.5 | length 1203.1
  Top Layer w10: D2.3@1713.38,1649.99 1749.4,1649.4 v1(1749.4,1664.4) ; J3.5@2613.61,1721.48 2624.4,1732.27 v1(2624.4,1784.4)
  Bottom Layer w10: v1@1749.4,1659.4 1749.4,1669.4 1829.4,1889.4 2514.4,1894.4 v1(2624.4,1784.4)
D2_4: D2.4 J3.1 pad.12 U28.16 | length 3808.4
  Top Layer w10: v1(1564.4,1654.4) 1568.81,1649.99 D2.4@1635.42,1649.99 ; J3.1@2416.76,1721.48 2429.4,1734.12 v1(2429.4,1779.4) ; v1(2884.4,1844.4) 2904.4,1844.4 3194.4,2134.4 pad.12@3199.4,2134.4 3199.4,2913.8 3295,3009.4 3615,3009.4 v1(3655.03,3049.4)
  Bottom Layer w10: v1(1564.4,1654.4) 1564.4,1549.4 1838.4,1549.4 1827,1692 1894.4,1804.4 1914.4,1824.4 2384.4,1824.4 v1(2429.4,1779.4) 2429.4,1674.4 2749.4,1674.4 2884.4,1809.4 v1(2884.4,1844.4) ; v1(3655.03,3049.4) 3677.67,3026.76 U28.16@3725.77,3026.76
D2_6: D2.6 J3.2 pad.11 U28.17 | length 3505.9
  Top Layer w10: v1(1589.4,1584.4) 1603.81,1598.81 D2.6@1635.42,1598.81 ; J3.2@2465.97,1721.48 2479.4,1734.91 v1(2479.4,1779.4) 2519.4,1819.4 2914.4,1819.4 3214.4,2119.4 pad.11@3214.4,2124.4 3219.4,2124.4 3219.4,2903.8 3305,2989.4 3670,2989.4 v1(3670.03,2964.4)
  Bottom Layer w10: v1(1589.4,1584.4) 1589.4,1569.4 1809.4,1569.4 1799.4,1684.4 1884.4,1844.4 2409.4,1849.4 v1(2479.4,1779.4) ; U28.17@3649.4,2914.4 3649.4,2943.77 v1(3670.03,2964.4)
J1_2: J1.2 | length 1946.8
  Top Layer w7: 4063.99,2985.5 4089.4,2985.5
  Top Layer w10: v1(3050.03,4239.4) J1.2@3050.03,4304.4 ; v1(3314.4,3884.4) 3424.4,3884.4 v1(3784.4,3524.4) ; v1(3994.4,3319.4) 3994.4,3274.4 4090,3274.4 4105,3259.4 4105,3000 4089.4,2984.4 ; 4063.99,2985.5 4067.7,2985.5 4068.8,2984.4
  Bottom Layer w10: v1(3050.03,4239.4) 3050.03,4148.77 v1(3314.4,3884.4) ; v1(3784.4,3524.4) 3839.4,3524.4 3994.4,3369.4 v1(3994.4,3319.4)
J1_3: J1.3 | length 1984.3
  Top Layer w7: 4063.99,2969.75 4100.3,2969.75
  Top Layer w10: v1(3010.66,4239.4) J1.3@3010.66,4304.4 ; v1(3289.4,3864.4) 3294.4,3859.4 3364.4,3859.4 v1(3704.4,3519.4) ; v1(3959.4,3354.4) 3999.4,3354.4 4059.4,3294.4 4095,3294.4 4124.4,3265 4124.4,2993.8 4100.3,2969.7
  Bottom Layer w10: v1(3010.66,4239.4) 3010.66,4143.14 v1(3289.4,3864.4) ; v1(3704.4,3519.4) 3704.4,3509.4 3769.4,3504.4 3839.4,3434.4 3879.4,3434.4 v1(3959.4,3354.4)
J1_5: J1.5 | length 2149.3
  Top Layer w10: v1(2931.92,4239.4) J1.5@2931.92,4304.4 ; v1(3249.4,3864.4) 3274.4,3839.4 3314.4,3839.4 v1(3604.4,3549.4) ; v1(4009.4,3399.4) 4009.4,3370.02 4070.02,3309.4 4105.02,3309.4 4140.02,3274.4 4140.02,2928.77 4130.54,2938.26 4063.99,2938.26
  Bottom Layer w10: v1(2931.92,4239.4) 2931.92,4181.88 v1(3249.4,3864.4) ; v1(3604.4,3549.4) 3859.4,3549.4 v1(4009.4,3399.4)
J1_6: J1.6 | length 2286.7
  Top Layer w10: v1(2892.55,4239.4) J1.6@2892.55,4304.4 ; v1(3209.4,3859.4) 3244.4,3824.4 3294.4,3824.4 v1(3544.4,3574.4) ; v1(4009.4,3439.4) 4034.4,3414.4 4034.4,3370 4080,3324.4 4115,3324.4 4155.02,3284.38 4155.02,2888.77 4134.4,2909.4 4121.29,2922.51 4063.99,2922.51
  Bottom Layer w10: v1(2892.55,4239.4) 2892.55,4176.25 v1(3209.4,3859.4) ; v1(3544.4,3574.4) 3764.4,3574.4 3874.4,3574.4 v1(4009.4,3439.4)
J1_8: J1.8 | length 2434.3
  Top Layer w10: v1(2813.81,4239.4) J1.8@2813.81,4304.4 ; v1(3174.4,3859.4) 3224.4,3809.4 3284.4,3809.4 3404,3689.4 3484.4,3609 v1(3484.4,3599.4) ; v1(4054.4,3439.4) 4054.4,3374.4 4084.4,3344.4 4124.4,3344.4 4170.02,3298.77 4170.02,2874.4 4155.02,2859.4 4109.4,2859.4 4109.4,2891.01 4063.99,2891.01
  Bottom Layer w10: v1(2813.81,4239.4) 2813.81,4219.99 v1(3174.4,3859.4) ; v1(3484.4,3599.4) 3894.4,3599.4 v1(4054.4,3439.4)